# EAGLE board Transformer Breakout Board (EAGLE 9.5.0)
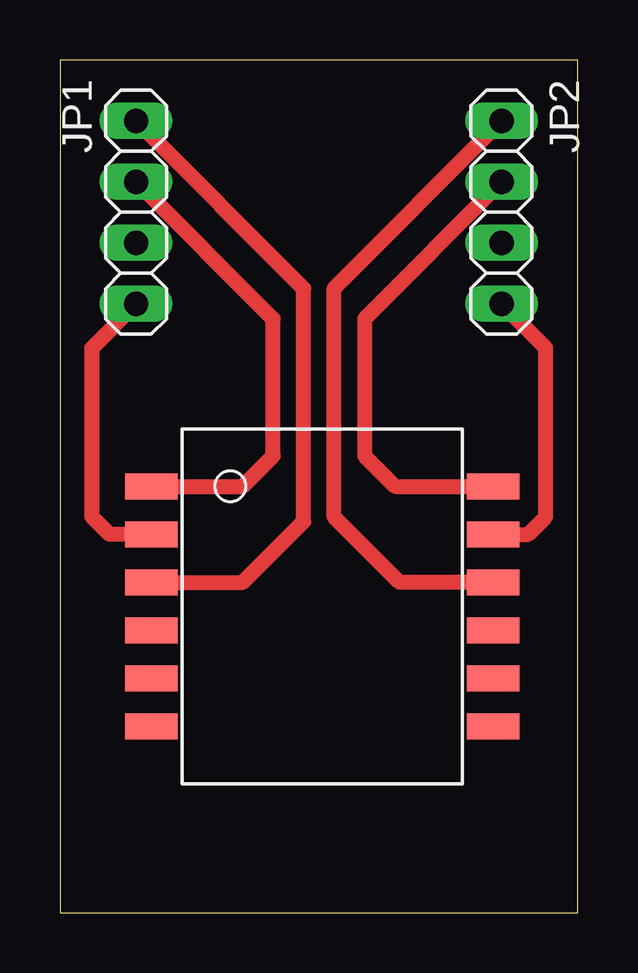
[diagram p0: board, top side]

Size 21.59 x 35.56 mm. Coordinates in mm from the lower left corner, seen from the top.
Outline: 0,0 21.59,0 21.59,35.56 0,35.56 0,0
Copper layers (1*16): Top 0.035mm / dielectric 1.5mm / Bottom 0.035mm
Design rules "DRC Advanced Circuits": minimum track width 6mil, minimum drill 15mil, track to track 6mil, track to pad 6mil, pad to pad 6mil, via to via 6mil, smd to smd 6mil, copper to edge 40mil, drill to drill 6mil, minimum pad ring 10mil, minimum via ring 8mil, stop-mask expansion 4mil, vias tented up to drill 0mil, thermal gap 10mil
Net classes: 0 default: width 0.305 mm, clearance 0.152 mm

## Footprints (pad centres in the part's own frame; a part is rotated, then mirrored left to right if it is on the bottom)
1X04 = drill 1.016 long: 1 -3.81,0; 2 -1.27,0; 3 1.27,0; 4 3.81,0
HM2102NLT = smd 1.067 x 2.184: P$1 0,0; P$2 2,0; P$3 4,0; P$4 6,0; P$5 8,0; P$6 10,0; P$7 10,14.25; P$8 8,14.25; P$9 6,14.25; P$10 4,14.25; P$11 2,14.25; P$12 0,14.25

## Placement (x,y rotation side)
JP1  [1X04]  3.17,29.21 90 top
JP2  [1X04]  18.41,29.21 90 top
U$1  HM2102NLT  [HM2102NLT]  3.81,17.78 270 top

## Library data of the parts
JP1 JP2 U$1 = HyTechDevices

## Nets
N$1: JP1.1 U$1.P$2
N$2: JP1.3 U$1.P$1
N$3: JP1.4 U$1.P$3
N$4: JP2.4 U$1.P$10
N$5: JP2.3 U$1.P$12
N$6: JP2.1 U$1.P$11

## Tracks (layer width: path | path; a pad name or v marks a point on that pad's centre or on a via)
N$1
  Top 0.635: U$1.P$2 2.06,15.78 1.33,16.51 1.33,23.56 JP1.1
N$2
  Top 0.635: JP1.3 8.89,24.77 8.89,19.05 7.62,17.78 U$1.P$1
N$3
  Top 0.635: JP1.4 10.16,26.04 10.16,16.32 7.62,13.78 U$1.P$3
N$4
  Top 0.635: U$1.P$10 14.16,13.78 11.43,16.51 11.43,26.04 JP2.4
N$5
  Top 0.635: JP2.3 12.7,24.77 12.7,19.05 13.97,17.78 U$1.P$12
N$6
  Top 0.635: U$1.P$11 19.53,15.78 20.26,16.51 20.26,23.56 JP2.1

## Text on the board
tDocu: HyTech Racing | Transformer | Breakout